# Altium PCB PCB_PiHexa_2021-12-09.pcbdoc
Units mil, origin at the board's own origin, x right, y up, seen from the top; angles counter-clockwise.
Board outline 4947.01 x 2701.34 mil, 2 copper layers (Top Layer, Bottom Layer); 15 components, 41 nets, 124 pads, 1 vias.
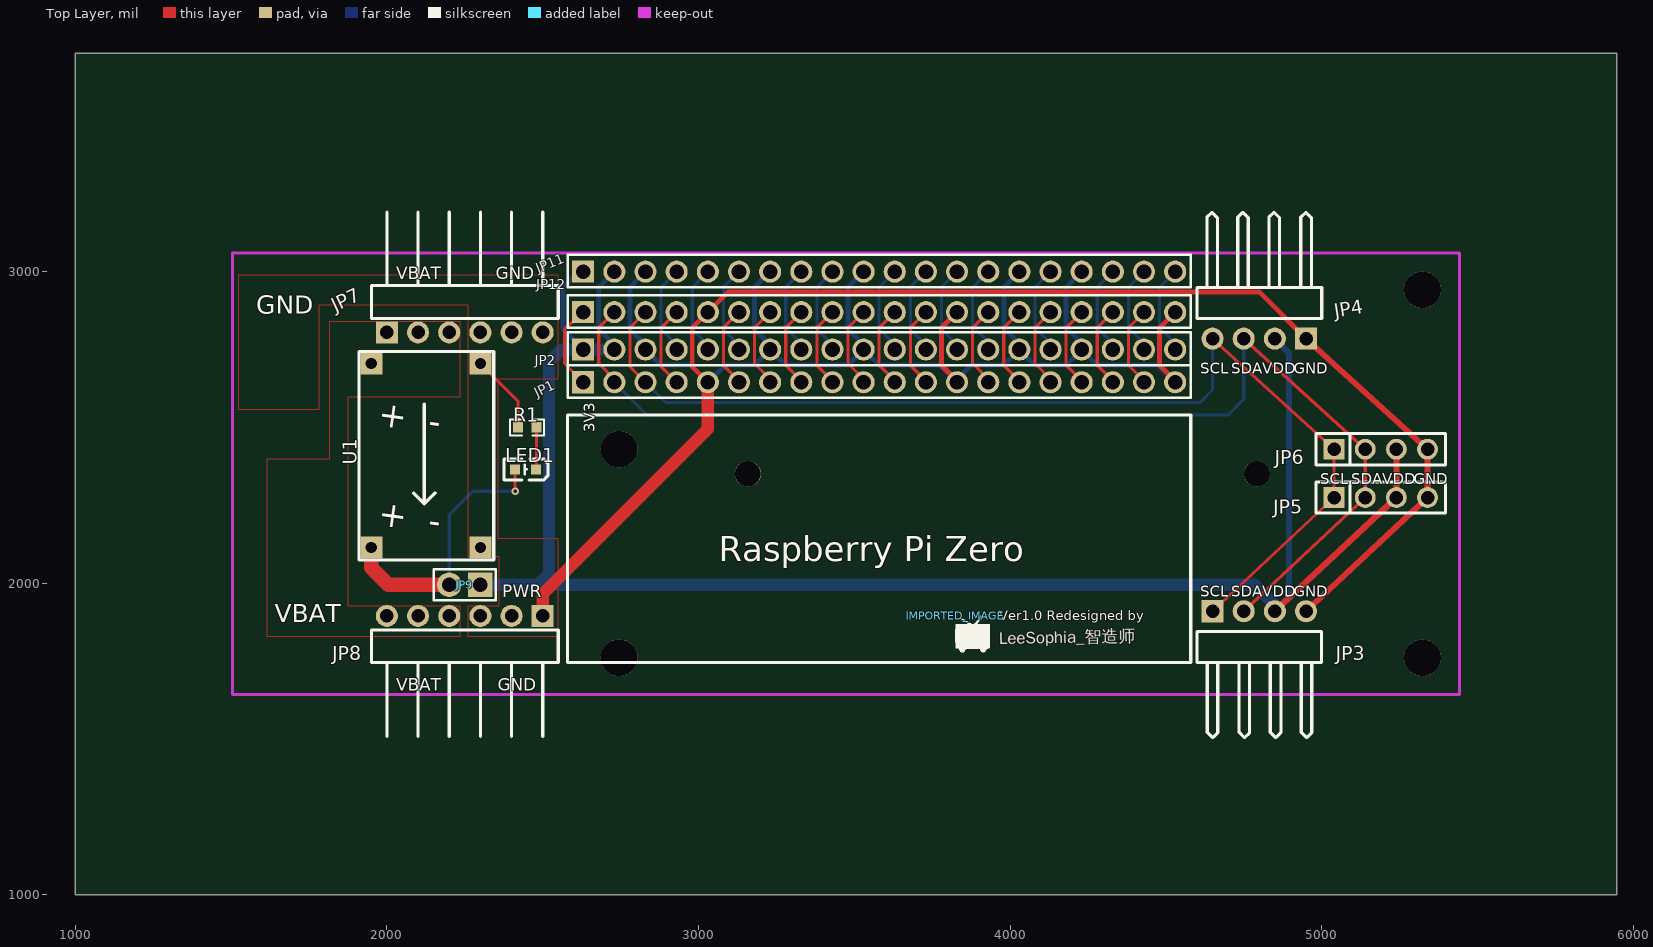
[diagram p0: Top Layer view]
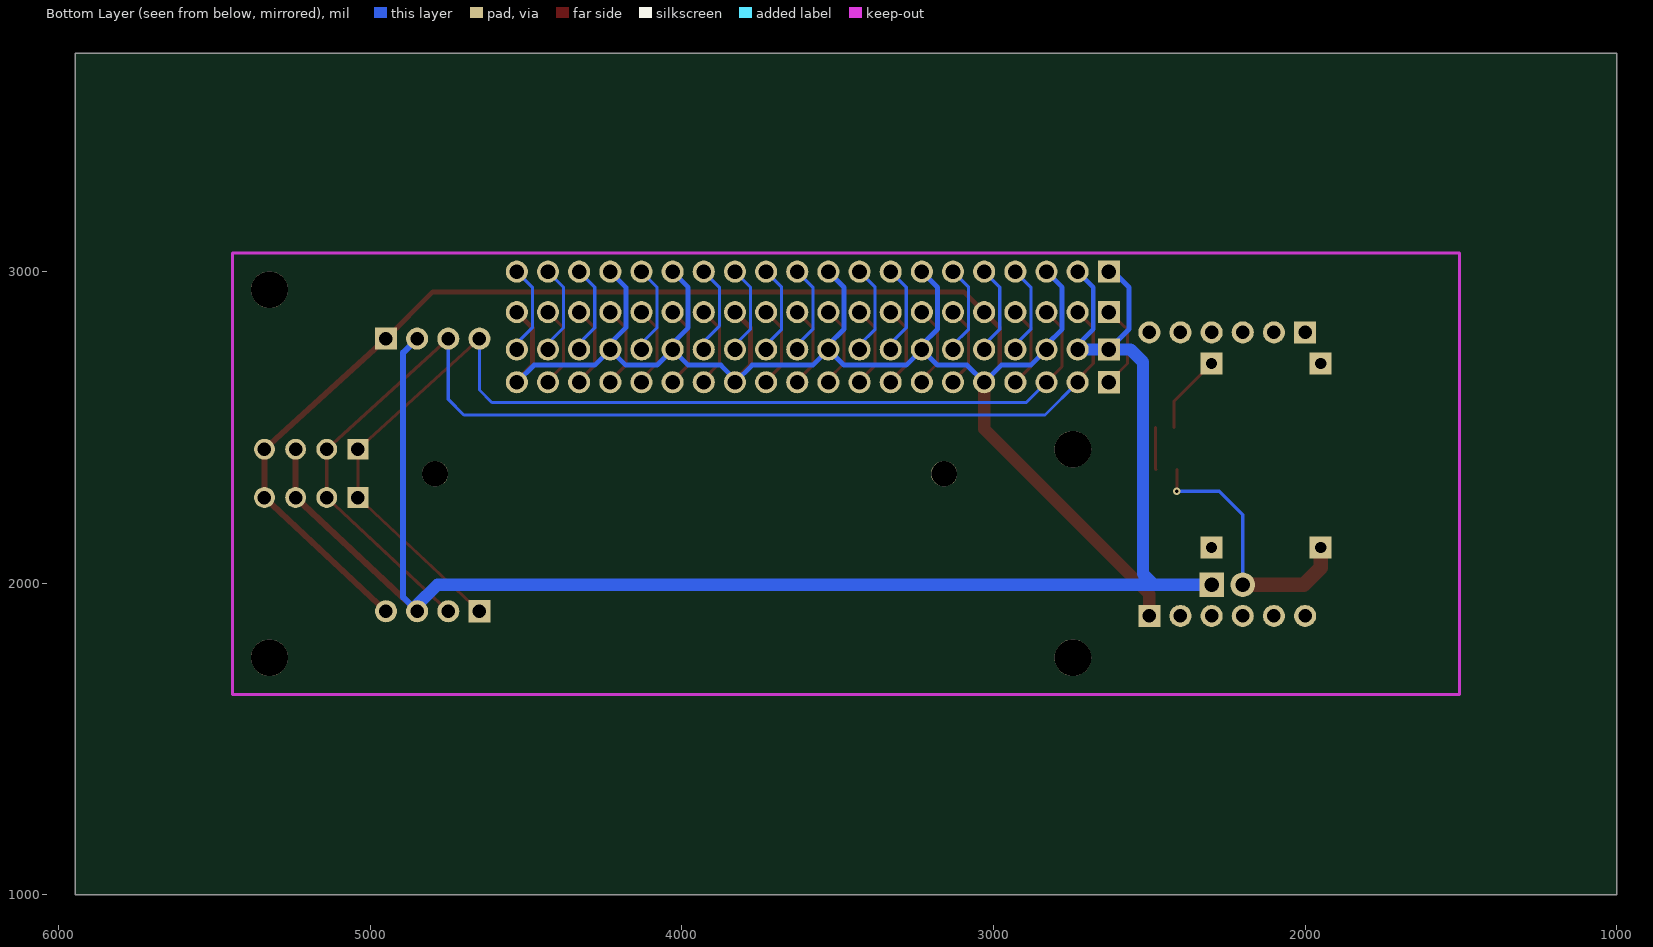
[diagram p1: Bottom Layer view, seen from below]

## Layer stack, top to bottom
Top Layer: signal copper (thickness not stored)
Dielectric: dielectric 12.6, FR-4, Dk 4.8
Bottom Layer: signal copper (thickness not stored)

## Board outline
5947.01,1000 1000,1000 1000,3701.34 5947.01,3701.34

## Components (designator, comment, footprint, x,y, rotation, side; value= is the part's Value field where it differs from the comment)
IMPORTED_IMAGE "IMPORTED_IMAGE" IMPORTED_IMAGE 3824.92,1897 r0 top
JP1 "Header-Female-2.54_1x20" HDR-TH_20P-P2.54-V-F 3580,2645.67 r0 top
JP2 "Header-Female-2.54_1x20" HDR-TH_20P-P2.54-V-F 3580,2750.67 r0 top
JP3 "2.54-1*4P反弯排针" HDR-TH_4P-P2.54-H-M-W10.4 4800,1910.67 r0 top
JP4 "2.54-1*4P反弯排针" HDR-TH_4P-P2.54-H-M-W10.4 4800,2785.67 r180 top
JP5 "Z-211-0411-0021-001" HDR-TH_4P-P2.54-V-M 5190,2275.67 r0 top
JP6 "Z-211-0411-0021-001" HDR-TH_4P-P2.54-V-M 5190,2430.67 r0 top
JP7 "2.54-1*6PHeader-RA" HDR-TH_6P-P2.54-H-M-W10.0 2250,2805.67 r0 top
JP8 "2.54-1*6PHeader-RA" HDR-TH_6P-P2.54-H-M-W10.0 2250,1895.67 r180 top
JP9 "2.54mm 1*2P" HDR-TH_2P-P2.54-V-M 2250,1995.67 r180 top
JP11 "210S-1*20P L=11.6MMGold-plated black" HDR-TH_20P-P2.54-V-M-1 3580,3000.67 r0 top
JP12 "210S-1*20P L=11.6MMGold-plated black" HDR-TH_20P-P2.54-V-M-1 3580,2870.67 r0 top
LED1 "19-21CUTD/S3484/TR8" LED0603-R-RD 2445,2365.67 r180 top
R1 "499" R0603 2450,2500.67 r0 top
U1 "MINI360 DCDC" MINI360 1910,2075.67 r90 top

## Footprints (in the part's own frame and the unit in brackets; to place one, negate y for a bottom-side part, rotate by r counter-clockwise, add the part's x,y. Pads: shape width x height; smd on the part's side, far side on the other; paste and mask are expansions set on the pad)
HDR-TH_2P-P2.54-V-M [mm]
  rect 2x2 hole 1.2: 1(-1.27,0)
  round 2 hole 1.2: 2(1.27,0)
  silkscreen extent -2.54,-1.27 2.54,1.27
HDR-TH_4P-P2.54-H-M-W10.4 [mm]
  rect 1.8x1.8 hole 1.1: 1(-3.81,0)
  round 1.8 hole 1.1: 2(-1.27,0) 3(1.27,0) 4(3.81,0)
  silkscreen extent -5.09,-10.27 5.07,-1.65
HDR-TH_4P-P2.54-V-M [mm]
  rect 1.7x1.7 hole 1.1: 1(-3.81,0)
  round 1.7 hole 1.1: 2(-1.27,0) 3(1.27,0) 4(3.81,0)
  silkscreen extent -5.29,-1.27 5.29,1.27
HDR-TH_6P-P2.54-H-M-W10.0 [mm]
  rect 1.8x1.8 hole 1.1: 1(-6.35,0)
  round 1.8 hole 1.1: 2(-3.81,0) 3(-1.27,0) 4(1.27,0) 5(3.81,0) 6(6.35,0)
  silkscreen extent -7.62,1.14 7.62,9.81
HDR-TH_20P-P2.54-V-F [mm]
  rect 1.8x1.8 hole 1.2: 1(-24.13,0)
  round 1.8 hole 1.2: 2(-21.59,0) 3(-19.05,0) 4(-16.51,0) 5(-13.97,0) 6(-11.43,0) 7(-8.89,0) 8(-6.35,0) 9(-3.81,0) 10(-1.27,0) 11(1.27,0) 12(3.81,0) 13(6.35,0) 14(8.89,0) 15(11.43,0) 16(13.97,0) 17(16.51,0) 18(19.05,0) 19(21.59,0) 20(24.13,0)
  silkscreen extent -25.4,-1.27 25.4,1.4
HDR-TH_20P-P2.54-V-M-1 [mm]
  rect 1.8x1.8 hole 1.2: 1(-24.13,0)
  round 1.8 hole 1.2: 2(-21.59,0) 3(-19.05,0) 4(-16.51,0) 5(-13.97,0) 6(-11.43,0) 7(-8.89,0) 8(-6.35,0) 9(-3.81,0) 10(-1.27,0) 11(1.27,0) 12(3.81,0) 13(6.35,0) 14(8.89,0) 15(11.43,0) 16(13.97,0) 17(16.51,0) 18(19.05,0) 19(21.59,0) 20(24.13,0)
  silkscreen extent -25.4,-1.27 25.4,1.4
IMPORTED_IMAGE [mil]
  silkscreen extent 0,-118 110,0
LED0603-R-RD [mm]
  rect 0.8x0.8 smd: 1(0.851,0) 2(-0.851,0)
  silkscreen extent -1.82,-0.86 1.77,0.86
MINI360 [mil]
  rect 70.87x70.87 hole 36: 1(40,-40) 2(40,-390) 3(630,-40) 4(630,-390)
  silkscreen extent 0,-433 669,0
R0603 [mil]
  rect 31.75x34.02 smd: 1(-29.66,0) 2(29.66,0)
  silkscreen extent -55,-26 55,26

## Free pads (board coordinates)
  round 118.11 hole 118.11 unplated: ""(2745.16,1761.46) ""(2745.16,2430.75) ""(5323.9,1761.46) ""(5323.9,2942.56)
  round 82.68 hole 82.68 unplated: ""(3158.54,2352.01) ""(4792.4,2352.01)

## Via types
v1: diameter 24, hole 12, Top Layer to Bottom Layer, 1 vias

## Nets (pads, with @x,y where several pads share a name; then routed paths per layer and width w, separated by ;. In a path a pad name is that pad's centre, name@x,y a point inside that pad or via, vN(x,y) a via of type N, cw(c..) or ccw(c..) an arc to the next point about the centre after c; other vN are vias at no path point)
GND: JP1.5 JP1.13 JP1.20 JP2.3 JP2.7 JP2.10 JP2.15 JP2.17 JP3.4 JP4.1 JP5.4 JP6.4 JP7.4 JP7.5 JP7.6 JP8.1 JP8.2 JP8.3 JP11.3 JP11.7 JP11.10 JP11.15 JP11.17 JP12.5 JP12.13 JP12.20 R1.1 U1.2 U1.4 | length 8712.5
  Top Layer w10: U1.4 2420.34,2585.33 R1.1
  Top Layer w15.75: JP1.5 2980,2695.67 2980,2820.67 JP12.5 3095,2935.67 4800,2935.67 JP4.1 ; JP1.13 3830,2650.67 3780,2700.67 3780,2820.67 JP12.13 ; JP1.20 4530,2650.67 4480,2700.67 4480,2820.67 JP12.20
  Top Layer w19.68: JP3.4 JP5.4 JP6.4 JP4.1
  Top Layer w39.37: JP8.1 2500,1965.67 3030,2495.67 JP1.5
  Bottom Layer w15.75: JP11.3 2780,2950.67 2780,2815.67 2830,2765.67 JP2.3 2880,2700.67 2975,2700.67 JP1.5 3085,2700.67 3180,2700.67 JP2.7 ; JP11.7 3180,2950.67 3180,2815.67 3230,2765.67 JP2.7 ; JP11.10 3480,2950.67 3480,2815.67 3530,2765.67 JP2.10 ; JP11.15 3980,2950.67 3980,2820.67 4030,2770.67 JP2.15 ; JP11.17 4180,2950.67 4180,2820.67 4230,2770.67 JP2.17 ; JP1.20 4475,2700.67 4280,2700.67 JP2.17 ; JP2.7 3280,2700.67 3480,2700.67 JP2.10 ; JP2.10 3580,2700.67 3775,2700.67 JP1.13 3830,2655.67 3875,2700.67 3980,2700.67 JP2.15 ; JP2.15 4080,2700.67 4180,2700.67 JP2.17
JP1_1: JP1.1 JP12.1 | length 276.2
  Top Layer w10: JP1.1 2570,2705.67 2570,2815.67 JP12.1
JP1_2: JP1.2 JP3.2 JP4.3 JP5.2 JP6.2 JP12.2 | length 3762.2
  Top Layer w10: JP1.2 2730,2655.67 2680,2705.67 2680,2820.67 JP12.2 ; JP3.2 JP5.2 JP6.2 JP4.3
  Bottom Layer w10: JP1.2 2835,2540.67 4700,2540.67 4750,2590.67 JP4.3
JP1_3: JP1.3 JP3.1 JP4.4 JP5.1 JP6.1 JP12.3 | length 3511.4
  Top Layer w10: JP1.3 2780,2695.67 2780,2820.67 JP12.3 ; JP3.1 JP5.1 JP6.1 JP4.4
  Bottom Layer w10: JP1.3 2895,2580.67 4610,2580.67 4650,2620.67 JP4.4
JP1_4: JP1.4 JP12.4 | length 266.4
  Top Layer w10: JP1.4 2880,2695.67 2880,2820.67 JP12.4
JP1_6: JP1.6 JP12.6 | length 266.4
  Top Layer w10: JP1.6 3130,2650.67 3080,2700.67 3080,2820.67 JP12.6
JP1_7: JP1.7 JP12.7 | length 266.4
  Top Layer w10: JP1.7 3230,2655.67 3180,2705.67 3180,2820.67 JP12.7
JP1_8: JP1.8 JP12.8 | length 266.4
  Top Layer w10: JP1.8 3330,2650.67 3280,2700.67 3280,2820.67 JP12.8
JP1_9: JP1.9 JP12.9 | length 266.4
  Top Layer w10: JP1.9 3430,2650.67 3380,2700.67 3380,2820.67 JP12.9
JP1_10: JP1.10 JP12.10 | length 266.4
  Top Layer w10: JP1.10 3530,2655.67 3480,2705.67 3480,2820.67 JP12.10
JP1_11: JP1.11 JP12.11 | length 266.4
  Top Layer w10: JP1.11 3630,2650.67 3580,2700.67 3580,2820.67 JP12.11
JP1_12: JP1.12 JP12.12 | length 266.4
  Top Layer w10: JP1.12 3730,2650.67 3680,2700.67 3680,2820.67 JP12.12
JP1_14: JP1.14 JP12.14 | length 266.4
  Top Layer w10: JP1.14 3930,2655.67 3880,2705.67 3880,2820.67 JP12.14
JP1_15: JP1.15 JP12.15 | length 266.4
  Top Layer w10: JP1.15 4030,2650.67 3980,2700.67 3980,2820.67 JP12.15
JP1_16: JP1.16 JP12.16 | length 266.4
  Top Layer w10: JP1.16 4130,2655.67 4080,2705.67 4080,2820.67 JP12.16
JP1_17: JP1.17 JP12.17 | length 266.4
  Top Layer w10: JP1.17 4230,2650.67 4180,2700.67 4180,2820.67 JP12.17
JP1_18: JP1.18 JP12.18 | length 266.4
  Top Layer w10: JP1.18 4330,2650.67 4280,2700.67 4280,2820.67 JP12.18
JP1_19: JP1.19 JP12.19 | length 266.4
  Top Layer w10: JP1.19 4430,2650.67 4380,2700.67 4380,2820.67 JP12.19
JP2_4: JP2.4 JP11.4 | length 291.4
  Bottom Layer w10: JP2.4 2930,2765.67 2880,2815.67 2880,2950.67 JP11.4
JP2_5: JP2.5 JP11.5 | length 291.4
  Bottom Layer w10: JP2.5 3030,2765.67 2980,2815.67 2980,2950.67 JP11.5
JP2_6: JP2.6 JP11.6 | length 291.4
  Bottom Layer w10: JP2.6 3130,2765.67 3080,2815.67 3080,2950.67 JP11.6
JP2_8: JP2.8 JP11.8 | length 291.4
  Bottom Layer w10: JP2.8 3330,2770.67 3280,2820.67 3280,2950.67 JP11.8
JP2_9: JP2.9 JP11.9 | length 291.4
  Bottom Layer w10: JP2.9 3430,2765.67 3380,2815.67 3380,2950.67 JP11.9
JP2_11: JP2.11 JP11.11 | length 291.4
  Bottom Layer w10: JP2.11 3630,2765.67 3580,2815.67 3580,2950.67 JP11.11
JP2_12: JP2.12 JP11.12 | length 291.4
  Bottom Layer w10: JP2.12 3730,2765.67 3680,2815.67 3680,2950.67 JP11.12
JP2_13: JP2.13 JP11.13 | length 291.4
  Bottom Layer w10: JP2.13 3830,2765.67 3780,2815.67 3780,2950.67 JP11.13
JP2_14: JP2.14 JP11.14 | length 291.4
  Bottom Layer w10: JP2.14 3930,2775.67 3880,2825.67 3880,2950.67 JP11.14
JP2_16: JP2.16 JP11.16 | length 291.4
  Bottom Layer w10: JP2.16 4130,2770.67 4080,2820.67 4080,2950.67 JP11.16
JP2_18: JP2.18 JP11.18 | length 291.4
  Bottom Layer w10: JP2.18 4330,2770.67 4280,2820.67 4280,2950.67 JP11.18
JP2_19: JP2.19 JP11.19 | length 291.4
  Bottom Layer w10: JP2.19 4430,2770.67 4380,2820.67 4380,2950.67 JP11.19
JP2_20: JP2.20 JP11.20 | length 291.4
  Bottom Layer w10: JP2.20 4530,2770.67 4480,2820.67 4480,2950.67 JP11.20
R1_2: LED1.2 R1.2 | length 135.5
  Top Layer w10: LED1.2 2479.66,2366.83 R1.2
S$7: 
S$9: 
S$11: 
S$13: 
S$62: 
S$64: 
U1_1: JP9.2 LED1.1 U1.1 | length 875.3
  Top Layer w10: v1(2411.5,2295.67) LED1.1
  Top Layer w47.24: U1.1 1950,2050.67 2005,1995.67 JP9.2
  Bottom Layer w10: JP9.2 2200,2220.67 2275,2295.67 v1(2411.5,2295.67)
VCC: JP7.1 JP7.2 JP7.3 JP8.4 JP8.5 JP8.6 U1.3
VDD: JP2.1 JP2.2 JP3.3 JP4.2 JP5.3 JP6.3 JP9.1 JP11.1 JP11.2 | length 5758.5
  Top Layer w19.68: JP3.3 JP5.3 JP6.3
  Bottom Layer w15.75: JP2.1 2565,2815.67 2565,2950.67 2615,3000.67 JP11.1 ; JP2.2 2730,2765.67 2680,2815.67 2680,2950.67 JP11.2
  Bottom Layer w19.68: JP3.3 4895,1955.67 4895,2740.67 JP4.2
  Bottom Layer w39.37: JP9.1 2485,1995.67 ; JP2.2 JP2.1 2560,2750.67 2520,2710.67 2520,2030.67 2485,1995.67 ; JP3.3 4850,1930.67 4785,1995.67 2485,1995.67

## Polygon pours and split planes (outlines as drawn)
VCC on Top Layer (solid): 2233.35,1927.83 2233.35,1829.41 1615.24,1829.41 1615.24,2400.28 1816.02,2400.28 1816.02,2841.22 2233.35,2841.22 2233.35,2597.13 1875.08,2597.13 1875.08,1927.83 2233.35,1927.83
GND on Top Layer (solid): 1525,2557.76 1525,2990.83 2548.31,2990.83 2548.31,2655.67 2355,2655.67 2355,2144.37 2548.31,2144.37 2548.31,1829.41 2260.91,1829.41 2260.91,1927.83 2360,1927.83 2360,2085.32 2260.91,2085.32 2260.91,2892.4 1780.59,2892.4 1780.59,2557.76

## Silkscreen, mask and mechanical layers (free items; w line width, h text height)
Top Overlay:
  lines w10: 2580,1745.67 4580,1745.67 4580,2540.67 2580,2540.67 2580,1745.67
  text "VBAT" at 2030,2975.98 h39.37
  text "GND" at 2350,2975.98 h39.37
  text "GND" at 1580,2866.14 h59.05
  text "SCL" at 4610,2672.95 h35.43
  text "SDA" at 4710,2672.95 h35.43
  text "VDD" at 4810,2672.95 h35.43
  text "GND" at 4910,2672.95 h35.43
  text "3V3" at 2667.72,2485.67 h35.43 r90
  text "SCL" at 4995,2317.95 h35.43
  text "SDA" at 5095,2317.95 h35.43
  text "VDD" at 5195,2317.95 h35.43
  text "GND" at 5295,2317.95 h35.43
  text "Raspberry Pi Zero" at 3065,2070.67 h80
  text "SCL" at 4610,1957.95 h35.43
  text "SDA" at 4710,1957.95 h35.43
  text "VDD" at 4810,1957.95 h35.43
  text "GND" at 4910,1957.95 h35.43
  text "PWR" at 2370,1955.98 h39.37
  text "VBAT" at 1640,1876.14 h59.05
  text "Ver1.0 Redesigned by" at 3965,1870.67 h53.15
  text "LeeSophia_智造师" at 3965,1790.67 h68.9 r1
  text "VBAT" at 2030,1655.98 h39.37
  text "GND" at 2355,1655.98 h39.37
Top Solder:
  rectangle net VCC: 1625,1989.45 1861.22,2225.67
  rectangle net GND: 1535,2614.45 1771.22,2850.67

## Text inside footprints (layer, text, board x,y; h text height)
U1: Top Overlay "+  -" at 1969.43,2186.06 h80 r352; Top Overlay "+  -" at 1969.43,2506.06 h80 r352